# Altium PCB ALI PCB.PcbDoc
Units mil, origin at the board's own origin, x right, y up, seen from the top; angles counter-clockwise.
Board outline 2060 x 1990 mil, 2 copper layers (Top Layer, Bottom Layer); 9 components, 6 nets, 22 pads, 0 vias.
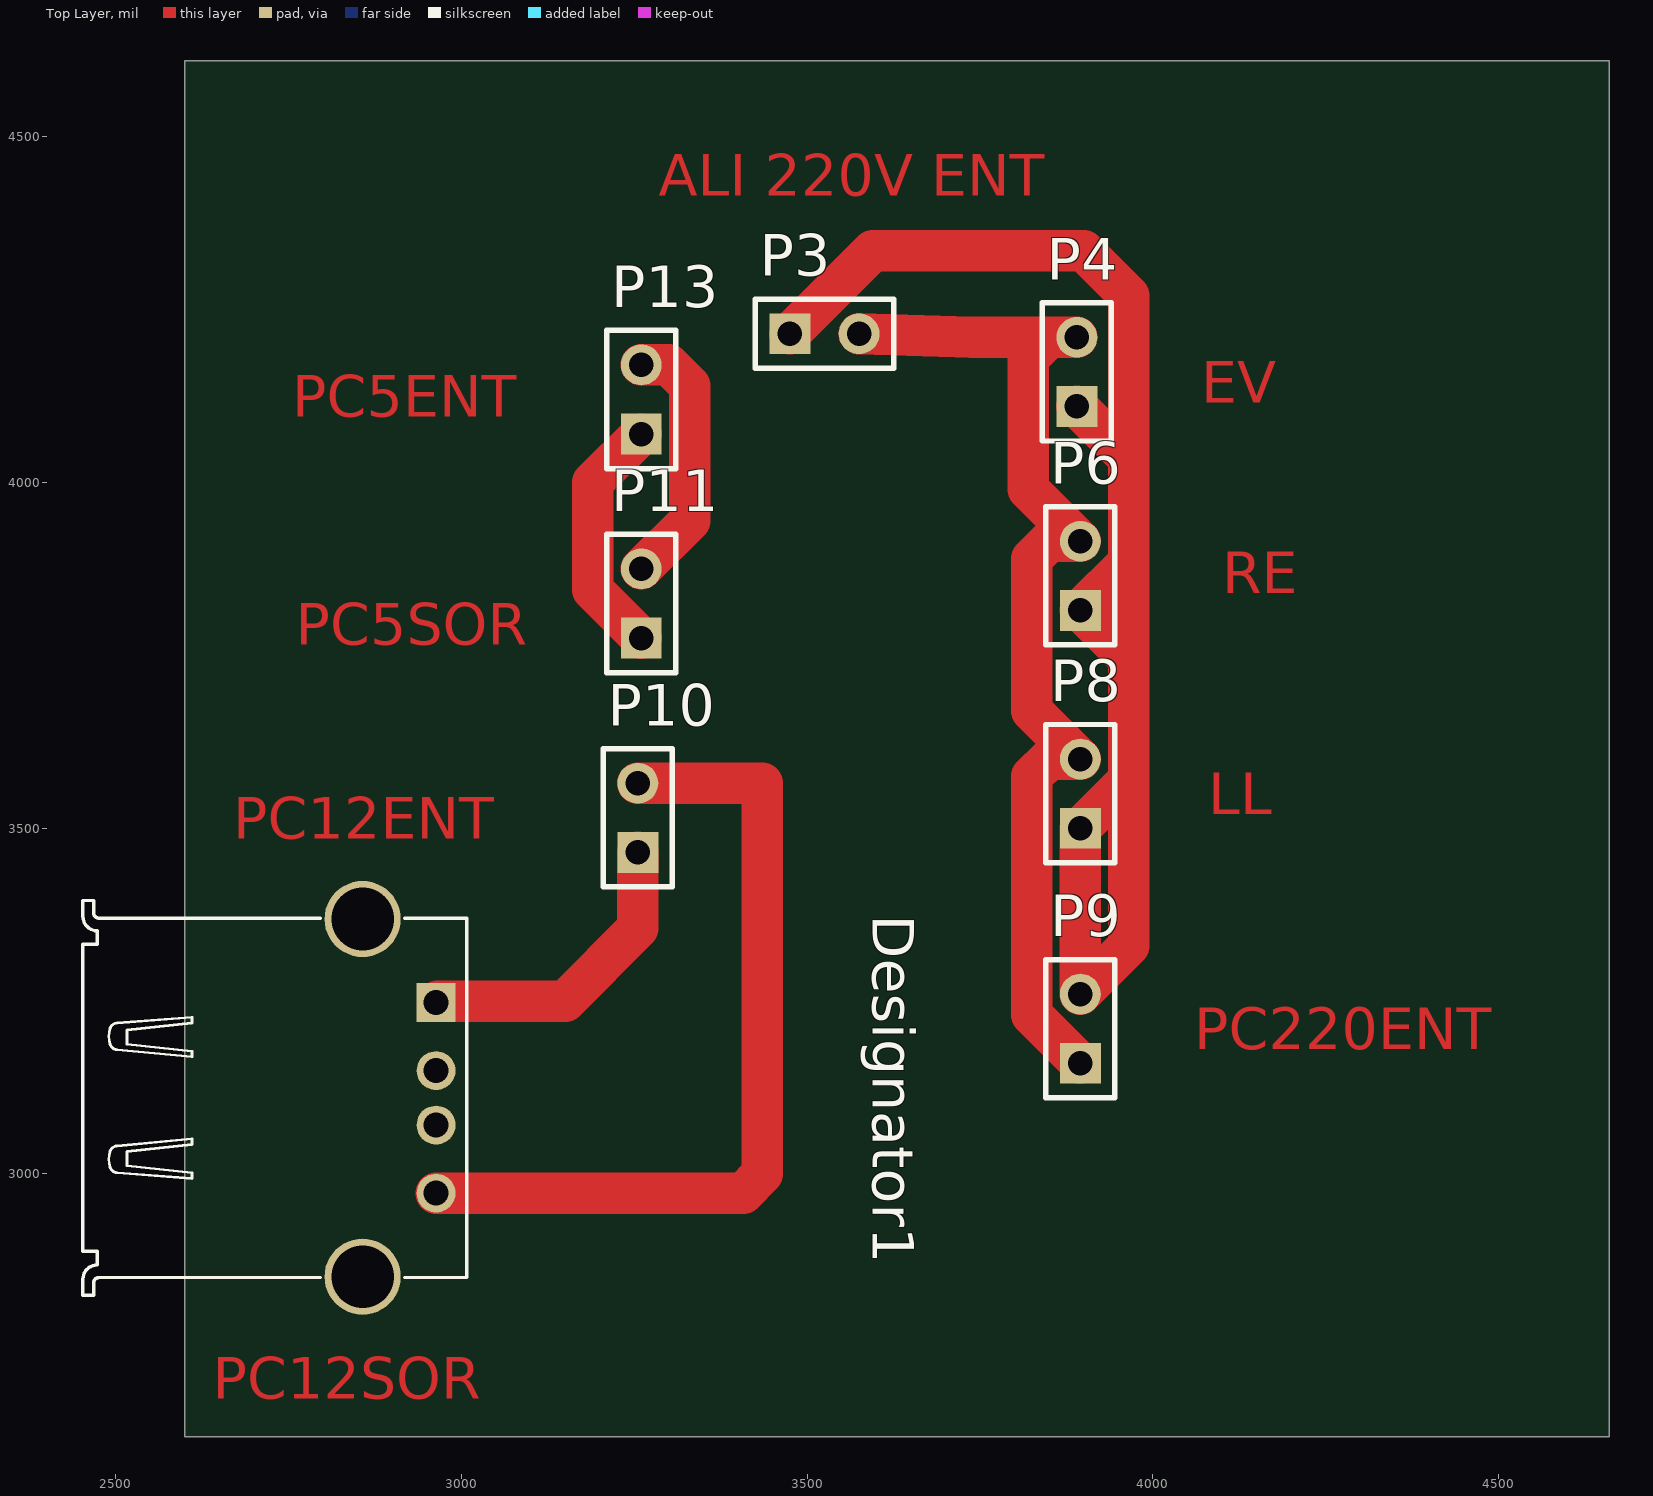
[diagram p0: Top Layer view]
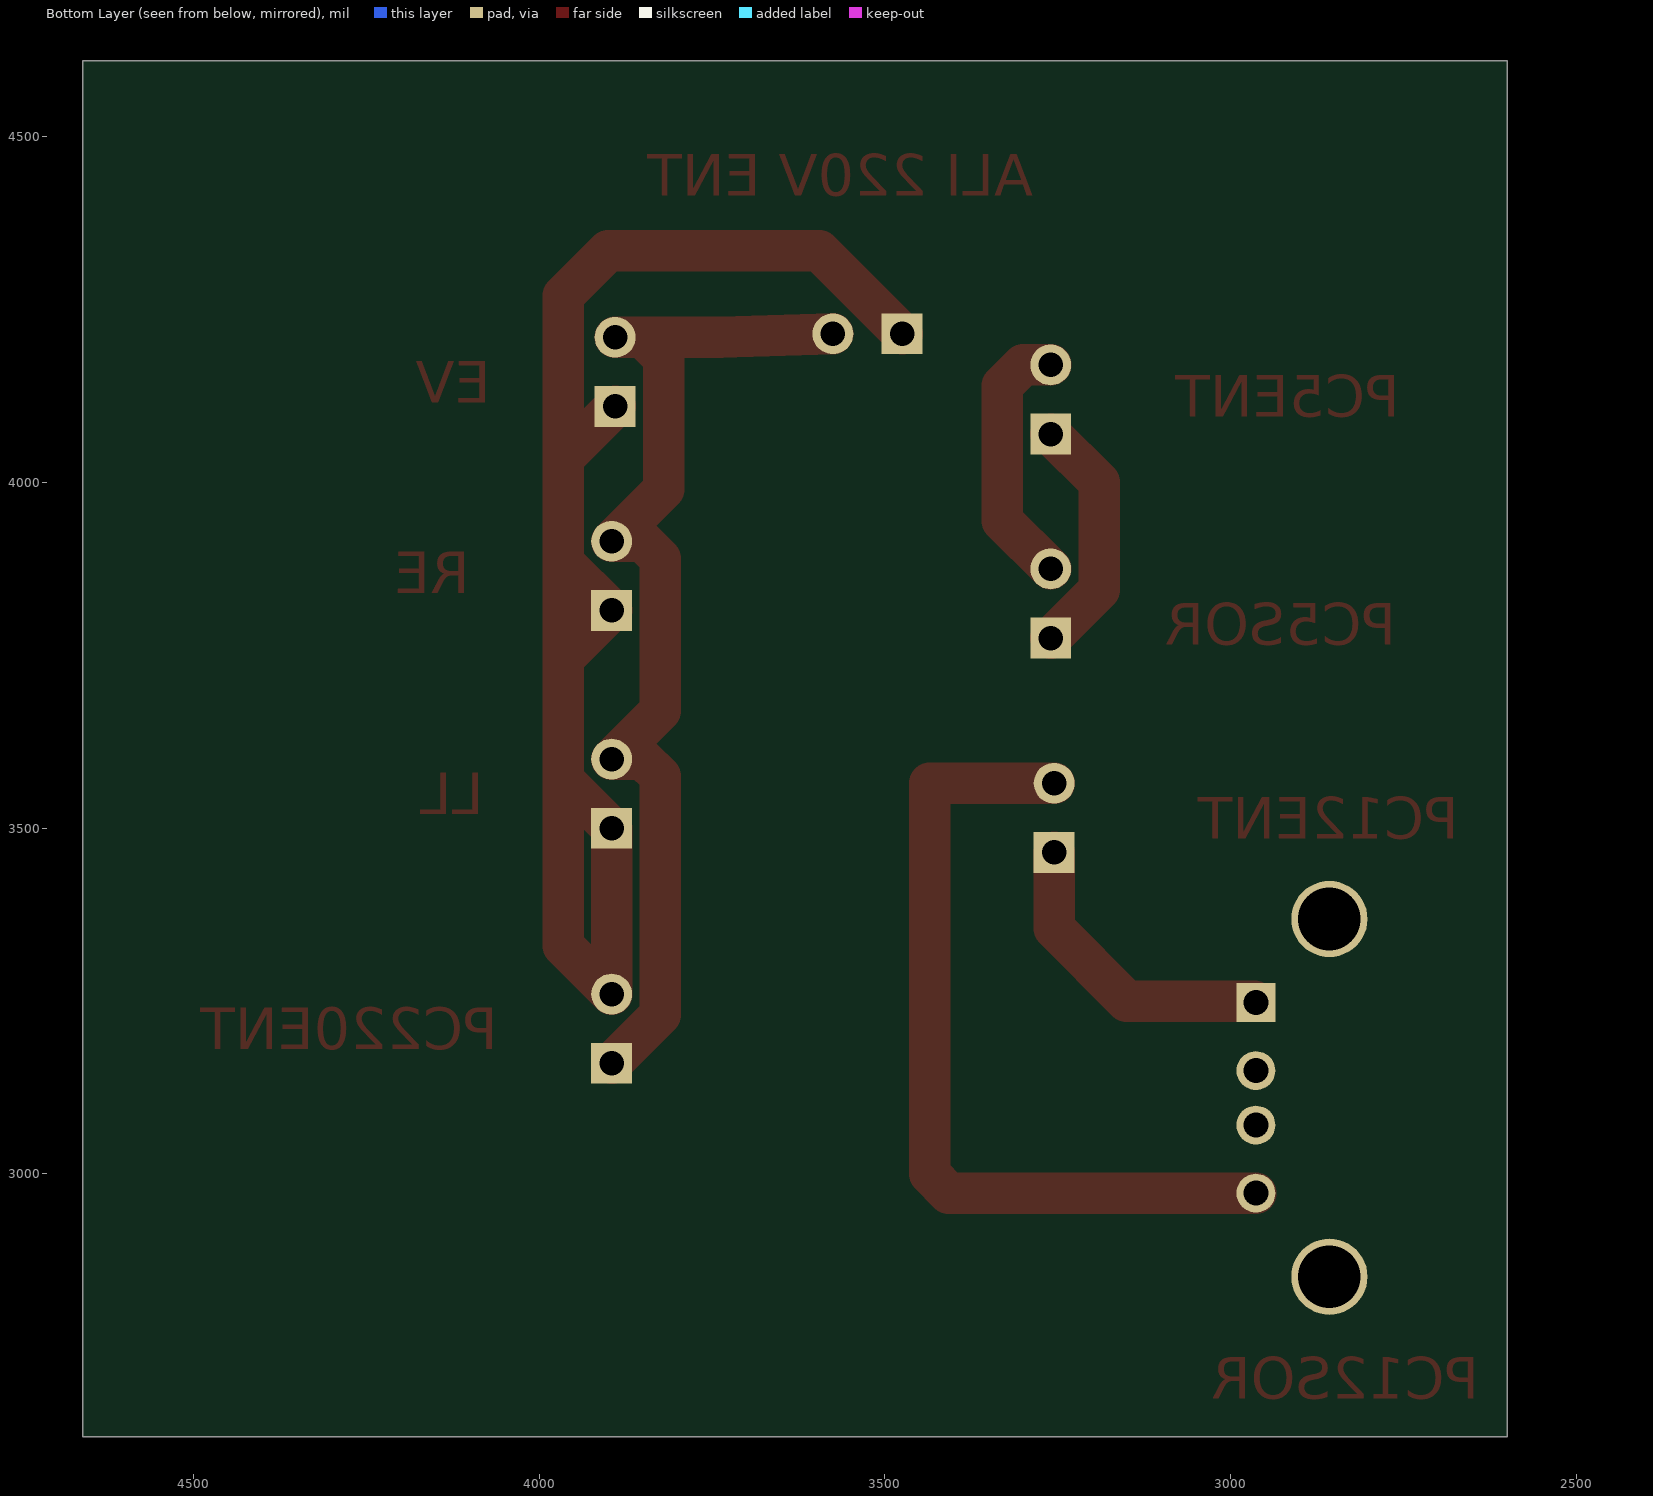
[diagram p1: Bottom Layer view, seen from below]

## Layer stack, top to bottom
Top Solder: solder mask 0.4, Solder Resist, Dk 3.5
Top Layer: signal copper 1.4
Dielectric 1: dielectric 12.6, FR-4, Dk 4.8
Bottom Layer: signal copper 1.4
Bottom Solder: solder mask 0.4, Solder Resist, Dk 3.5

## Board outline
2600,2620 4660,2620 4660,4610 2600,4610

## Design rules (kind name [scope] priority, off if disabled: settings)
Clearance [All] p1: gap=10
PolygonConnect [All] p1: connectstyle=Relief reliefconductorwidth=10 reliefentries=4 polygonreliefangle="90 Angle" airgapwidth=10
RoutingLayers [All] p1: top layer_v5=TRUE bottom layer_v5=FALSE
RoutingVias [All] p1: holewidth=28 width=50 viastyle="Through Hole" minholewidth=28 minwidth=50 maxholewidth=28 maxwidth=50
SolderMaskExpansion [All] p1: expansion=4
UnpouredPolygon [All] p1: allowunpoured=FALSE
Width [All] p1: maxlimit=60 minlimit=60 preferedwidth=60
28 further rules are at their usual default settings.

## Classes and differential pairs
component class Sheet2: P3 P4 P6 P8 P9 P10 P11 P13

## Components (designator, comment, footprint, x,y, rotation, side; value= is the part's Value field where it differs from the comment)
Designator1 "Comment" 61400416021 2910,3110 r270 top
P3 "ALI 220V" HDR1X2 3475,4215 r0 top
P4 "electrovanne" HDR1X2 3890,4110 r90 top
P6 "resistance" HDR1X2 3895,3815 r90 top
P8 "led light" HDR1X2 3895,3500 r90 top
P9 "ALI PC  220V ENT" HDR1X2 3895,3160 r90 top
P10 "ALI PC 5V ENT" HDR1X2 3255,3465 r90 top
P11 "ALI PC 12V ENT" HDR1X2 3260,3775 r90 top
P13 "ALI PC 12V SOR" HDR1X2 3260,4070 r90 top

## Footprints (in the part's own frame and the unit in brackets; to place one, negate y for a bottom-side part, rotate by r counter-clockwise, add the part's x,y. Pads: shape width x height; smd on the part's side, far side on the other; paste and mask are expansions set on the pad)
61400416021 [mm] "4 pins"
  rect 1.428x1.428 hole 0.92: 1(-3.5,1.35)
  round 1.428 hole 0.92: 2(-1,1.35) 3(1,1.35) 4(3.5,1.35)
  round 2.8 hole 2.3: Z1(-6.57,-1.35) Z2(6.57,-1.35)
  silkscreen extent -7.25,-11.63 7.25,2.47, body extent -7.9,-11.63 7.9,2.47, height 7.71
HDR1X2 [mm] "Connector; Header; 2 Position"
  rect 1.5x1.5 hole 0.9: 1(0,0)
  round 1.5 hole 0.9: 2(2.54,0)
  silkscreen extent -1.27,-1.27 3.81,1.27

## Part data
P3 P4 P6 P8 P9 P10 P11 P13: library part "Header 2", "Header, 2-Pin"

## Nets (pads, with @x,y where several pads share a name; then routed paths per layer and width w, separated by ;. In a path a pad name is that pad's centre, name@x,y a point inside that pad or via, vN(x,y) a via of type N, cw(c..) or ccw(c..) an arc to the next point about the centre after c; other vN are vias at no path point)
NetP3_1: P3.1 P4.1 P6.1 P8.1 P9.2 | length 2248.7
  Top Layer w60: P3.1 3595,4335 3900,4335 3965,4270 3965,4035 ; P4.1 3965,4035 ; 3965,3570 3965,3745 ; 3965,3570 P8.1 P9.2 3965,3330 3965,3570 ; 3965,3745 P6.1 3965,3885 ; 3965,3745 3965,3885 ; 3965,3885 3965,4035
NetP3_2: P3.2 P4.2 P6.2 P8.2 P9.1 | length 1577.3
  Top Layer w60: P3.2 3738,4210 3850,4210 ; P4.2 3850,4210 ; P9.1 3825,3230 3825,3575 3850,3600 P8.2 3825,3670 3825,3890 3850,3915 P6.2 3820,3990 3820,4180 3850,4210
NetP10_1: P10.1
NetP10_2: P10.2
NetP11_1: P11.1 P13.1 | length 353
  Top Layer w60: P11.1 3190,3845 3190,4000 P13.1
NetP11_2: P11.2 P13.2 | length 376.4
  Top Layer w60: P11.2 3330,3945 3330,4140 3300,4170 P13.2
pads on no net: Designator1.1 Designator1.2 Designator1.3 Designator1.4 Designator1.Z1 Designator1.Z2
copper on no net: | length 1671.5
  Top Layer w60: 2963.15,2972.2 3407.2,2972.2 3435,3000 3435,3565 3255,3565 ; 2965.36,3250 3150,3250 3255,3355 3255,3465

## Other copper
Top Layer:
  text "ALI 220V ENT" at 3285,4415 h60
  text "EV" at 4070,4115 h60
  text "PC5ENT" at 2755,4095 h60
  text "RE" at 4100,3840 h60
  text "PC5SOR" at 2760,3765 h60
  text "LL" at 4080,3520 h60
  text "PC12ENT" at 2670,3485 h60
  text "PC220ENT" at 4060,3180 h60
  text "PC12SOR" at 2640,2675 h60